# Altium PCB Encoder_PCB.PcbDoc
Units mm, origin at the board's own origin, x right, y up, seen from the top; angles counter-clockwise.
Board outline 17 x 17 mm, 2 copper layers (Top Layer, Bottom Layer); 5 components, 7 nets, 24 pads, 2 vias.
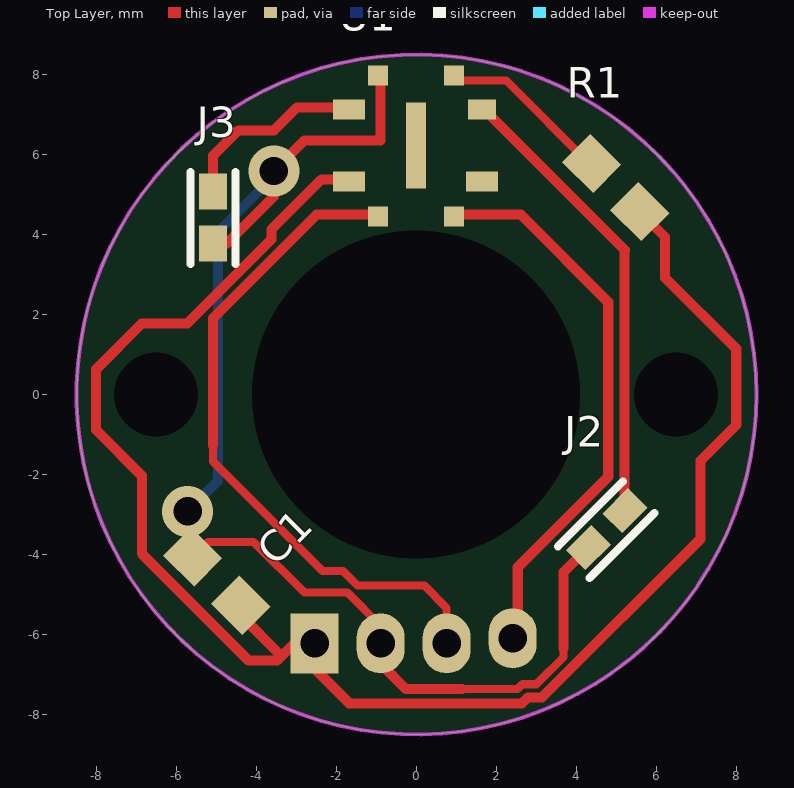
[diagram p0: Top Layer view]
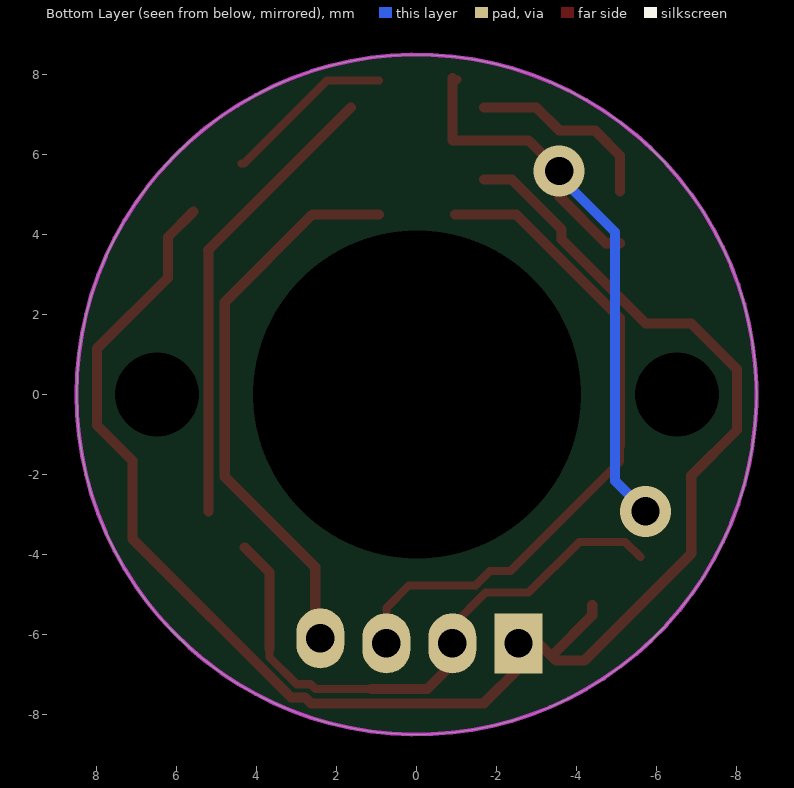
[diagram p1: Bottom Layer view, seen from below]

## Layer stack, top to bottom
Top Solder: solder mask 0.0102, Solder Resist, Dk 3.5
Top Layer: signal copper 0.0356
Dielectric1: dielectric 0.32, FR-4, Dk 4.8
Bottom Layer: signal copper 0.0356
Bottom Solder: solder mask 0.0102, Solder Resist, Dk 3.5

## Board outline
-8.491,0 ccw(c0.009,0) 0.009,-8.5 ccw(c0.009,0) 8.509,0 ccw(c0.009,0) 0.009,8.5 ccw(c0.009,0)

## Design rules (kind name [scope] priority, off if disabled: settings)
Clearance [All] p1: gap=0.102
ComponentClearance [All] p1 off: gap=0.254 collisioncheckmode=3 verticalgap=0.254 showdistances=FALSE
HoleSize [All] p1: absolutevalues=TRUE maxlimit=10 minlimit=0.025 maxpercent=80.000 minpercent=20.000
MinimumSolderMaskSliver [All] p1: minsoldermaskwidth=0.051
PolygonConnect [All] p1: connectstyle=Relief reliefconductorwidth=0.254 reliefentries=4 polygonreliefangle="90 Angle" airgapwidth=0.254
RoomDefinition Sheet1 [InComponentClass('Sheet1')] p1 off: confinementstyle=ConfineIn formatcopy=TRUE lockcomponents=FALSE outline 9.652,-9.525 19.558,-9.525 19.558,1.27 9.652,1.27
RoutingVias [All] p1: holewidth=0.711 width=1.27 viastyle="Through Hole" minholewidth=0.711 minwidth=1 maxholewidth=0.711 maxwidth=2
SilkToSilkClearance [All] p1 off: silktosilkclearance=0.254
SilkToSolderMaskClearance SilkscreenOverComponentPads [IsPad] p1 off: minsilkscreentomaskgap=0.254 clearancetoexposedcopper=TRUE
SolderMaskExpansion [All] p1: expansion=0.102
Width [All] p1: maxlimit=0.7 minlimit=0.203 preferedwidth=0.254
25 further rules are at their usual default settings.

## Components (designator, comment, footprint, x,y, rotation, side; value= is the part's Value field where it differs from the comment)
C1 "?F" 1608[0603] -5.588,-4.064 r315 top
J2 "*" 1005[0402] 5.223,-2.905 r225 top
J3 "*" 1005[0402] -5.08,5.08 r270 top
R1 "180" 1608[0603] 5.588,4.572 r135 top
U1 "AEDR850x" AEDR-850x 0,6.223 r0 top

## Footprints (in the part's own frame and the unit in brackets; to place one, negate y for a bottom-side part, rotate by r counter-clockwise, add the part's x,y. Pads: shape width x height; smd on the part's side, far side on the other; paste and mask are expansions set on the pad)
1005[0402] [mm] "SMT LED; 2 Flat Leads"
  rect 0.9x0.7 smd: 1(0,0) 2(1.3,0)
  silkscreen extent -0.48,-0.56 1.82,0.56
1608[0603] [mm] "Chip Capacitor; Body 1.6 x 0.8 mm (LxW typ)"
  rect 1.1x1 smd: 1(0,0) 2(1.7,0)
AEDR-850x [mm]
  rect 0.5x2.15 smd: 0(0,0)
  rect 0.5x0.5 smd: 1(0.95,1.753) 4(0.95,-1.778) 5(-0.95,-1.778) 8(-0.95,1.753)
  rect 0.7x0.5 smd: 2(1.651,0.9)
  rect 0.8x0.5 smd: 3(1.651,-0.9) 6(-1.676,-0.9) 7(-1.676,0.9)

## Part data
C1: library part Cap_BP, "Capacitor"
J2 J3 R1: library part Res, "Res"
U1: "Reflectiveo Optical Encoder"

## Free pads (board coordinates)
  round 5 hole 8.2 unplated: 0(0,0)
  rect 1.2x1.5 hole 0.711: 1(-2.54,-6.223)
  rect 0x0 hole 2.1: 1(6.5,0) 2(-6.5,0)
  oval 1.2x1.5 hole 0.711: 2(0.762,-6.223) 3(-0.889,-6.223) 4(2.413,-6.096)

## Via types
v1: diameter 1.27, hole 0.711, Top Layer to Bottom Layer, 2 vias

## Nets (pads, with @x,y where several pads share a name; then routed paths per layer and width w, separated by ;. In a path a pad name is that pad's centre, name@x,y a point inside that pad or via, vN(x,y) a via of type N, cw(c..) or ccw(c..) an arc to the next point about the centre after c; other vN are vias at no path point)
CHA: pad.2@0.762,-6.223 U1.5 | length 17
  Top Layer w0.203: -5.08,-1.27 -5.08,-1.674 -2.341,-4.413 -1.827,-4.413 -1.464,-4.776 0.204,-4.776 0.762,-5.334 pad.2@0.762,-6.223
  Top Layer w0.254: -5.08,-1.27 -5.08,1.905 -2.486,4.499 U1.5@-0.95,4.499
CHB: pad.4 U1.4 | length 13.9
  Top Layer w0.254: U1.4@0.95,4.499 2.613,4.499 4.802,2.31 4.802,-2.056 2.54,-4.318 2.54,-5.461 pad.4@2.413,-5.842
GND: C1.1 J2.2 J3.2 pad.3 U1.8 | length 31.5
  Top Layer w0.203: C1.1 -5.207,-3.683 -4.064,-3.683 -2.794,-4.953 -1.718,-4.953 -0.889,-5.782 pad.3 ; U1.8@-1.016,7.874 -0.991,7.849 U1.8@-0.95,7.849 ; 1.143,-7.366 2.536,-7.366 2.66,-7.242 3.009,-7.242 3.683,-6.568 3.683,-6.35
  Top Layer w0.254: J3.2 -4.729,3.78 -3.556,4.953 v1(-3.556,5.588) -2.794,6.35 -0.889,6.35 U1.8@-0.889,7.915 ; pad.3 -0.889,-6.731 -0.254,-7.366 1.143,-7.366 ; 3.683,-6.35 3.683,-4.445 J2.2
  Bottom Layer w0.254: v1(-5.715,-2.921) -4.953,-2.159 -4.953,4.064 v1@-3.492,5.524
NetJ2_1: J2.1 U1.2 | length 11.6
  Top Layer w0.254: U1.2@1.651,7.177 5.223,3.605 ; J2.1@5.207,-2.921 5.207,3.589
NetJ3_1: J3.1 U1.7 | length 4.8
  Top Layer w0.254: J3.1 -5.08,5.969 -4.445,6.604 -3.556,6.604 -2.983,7.177 U1.7@-1.676,7.177
NetR1_2: R1.2 U1.1 | length 4.3
  Top Layer w0.203: U1.1@0.95,7.849 2.251,7.849 4.326,5.774 R1.2
VCC: C1.2 pad.1@-2.54,-6.223 R1.1 U1.6 | length 42.3
  Top Layer w0.254: C1.2 -4.386,-5.52 -3.365,-6.54 ; pad.1@-2.667,-6.096 -2.54,-6.223 -3.048,-6.223 -3.365,-6.54 ; pad.1@-2.539,-6.858 -1.676,-7.722 2.647,-7.722 2.796,-7.572 3.145,-7.572 7.112,-3.606 7.112,-1.651 8.001,-0.762 8.001,1.143 6.223,2.921 6.223,3.937 R1.1 ; U1.6@-1.676,5.377 -2.37,5.377 -3.619,4.127 -3.619,3.873 -5.719,1.774 -5.965,1.774 -6.862,1.774 -8.001,0.635 -8.001,-0.889 -6.858,-2.032 -6.858,-3.978 -4.184,-6.653 -3.478,-6.653 -3.365,-6.54
pads on no net: U1.0 U1.3

## Keep-outs
Keep-Out Layer:
  circle w0.1: c0.009,0 r8.5